# EAGLE board REAQUIS HIGROM V1.0 placa (EAGLE 7.2.0)
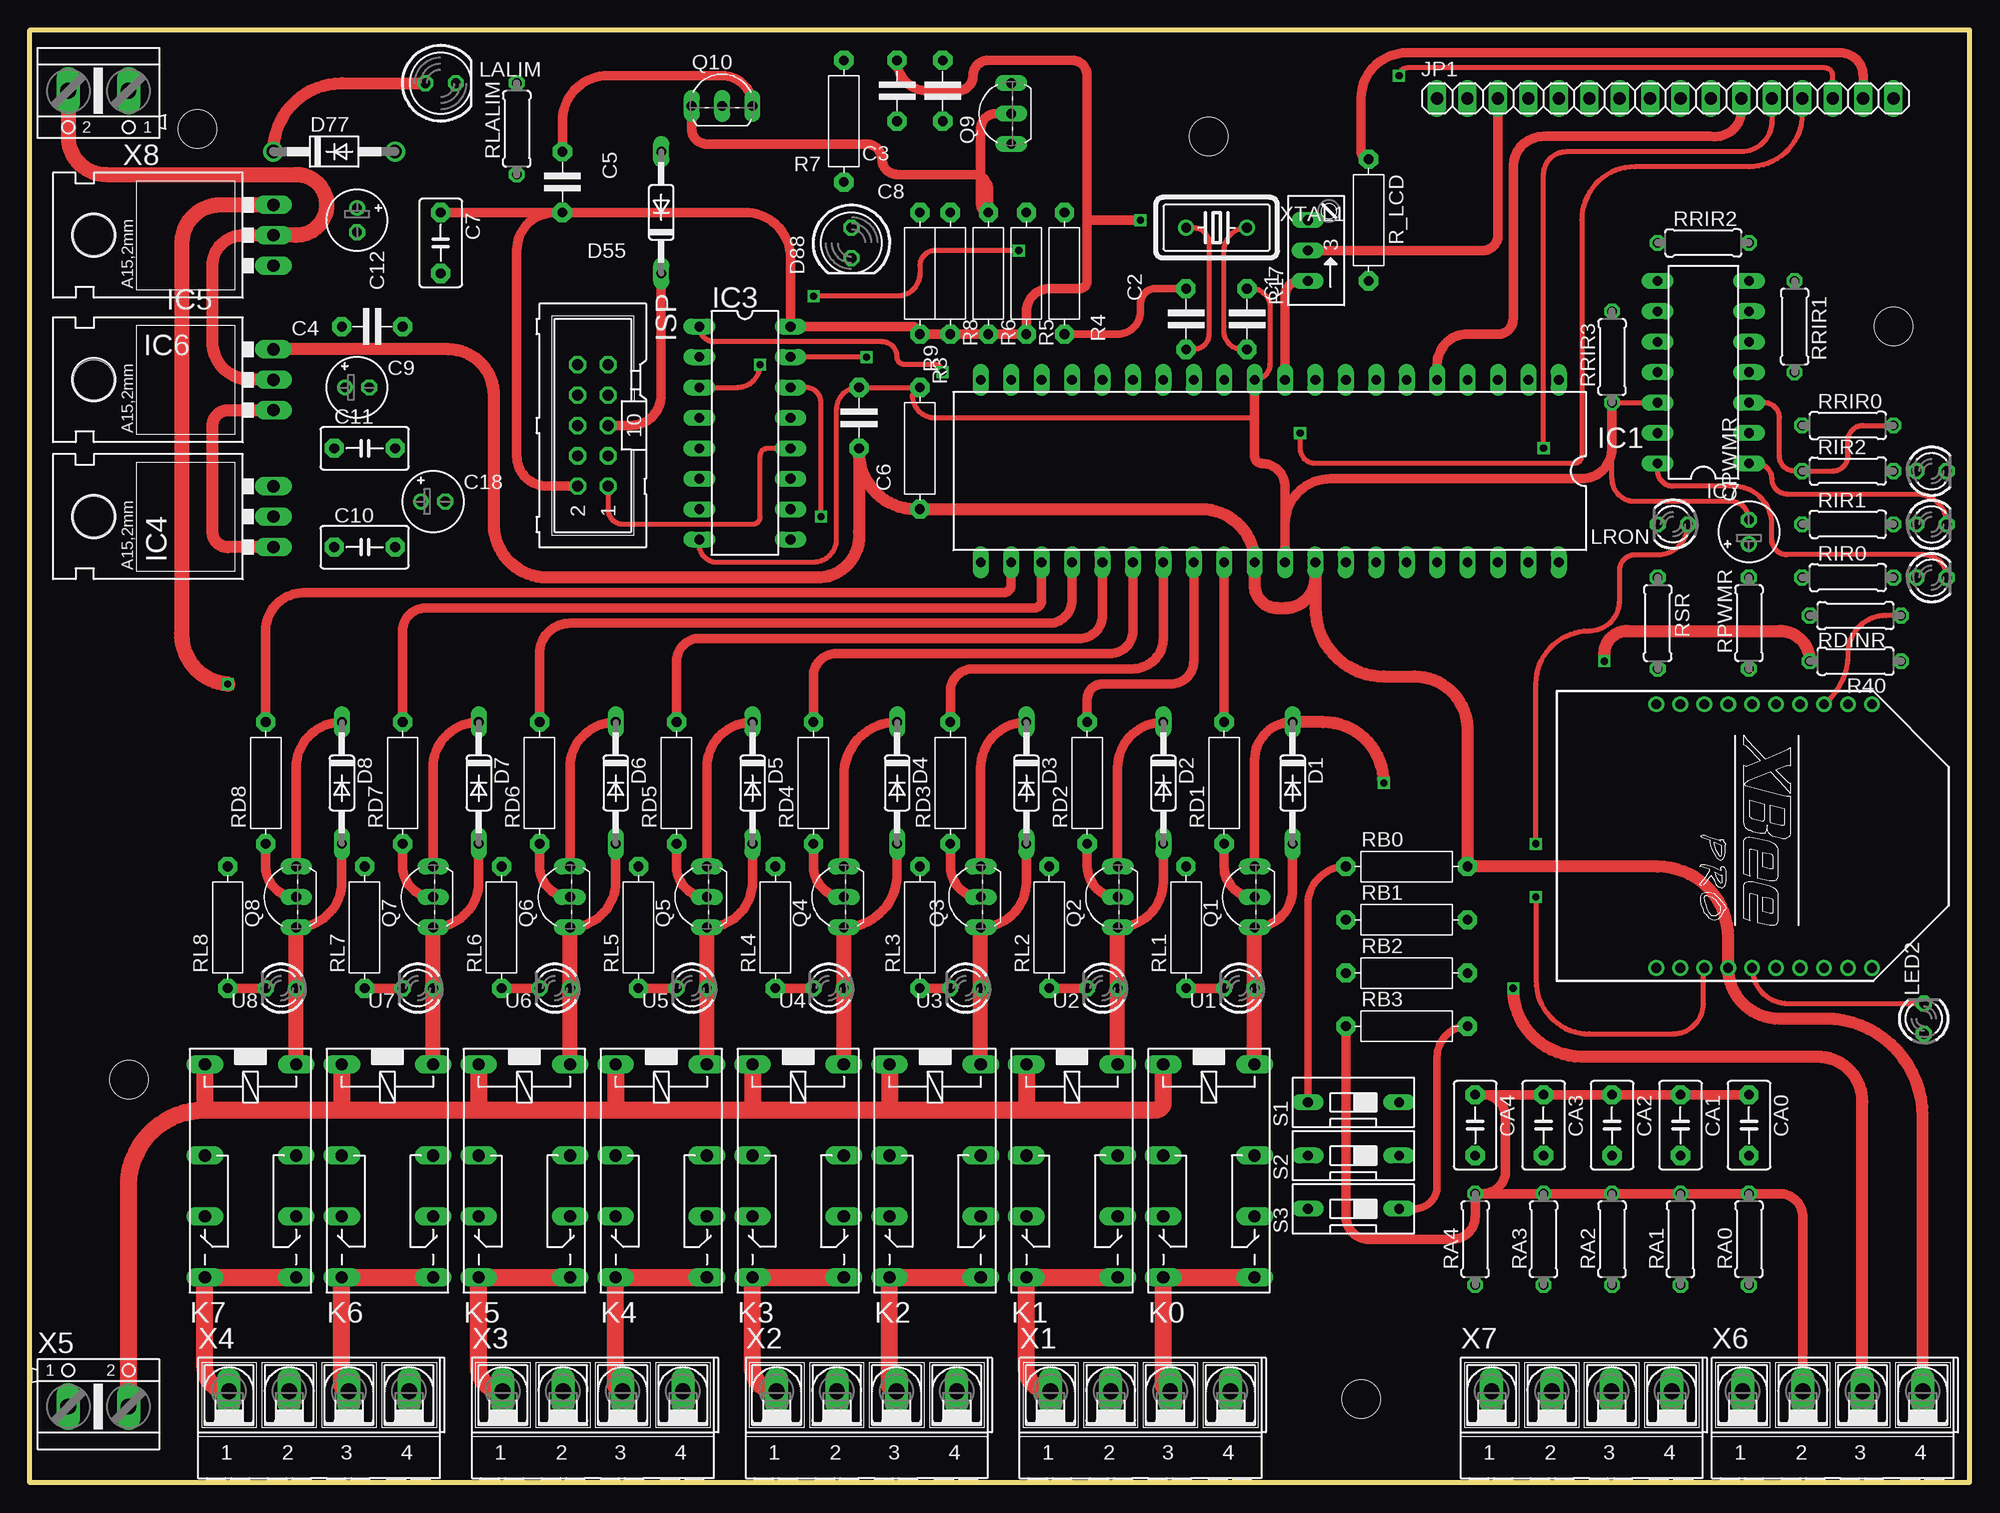
[diagram p0: board, top side]
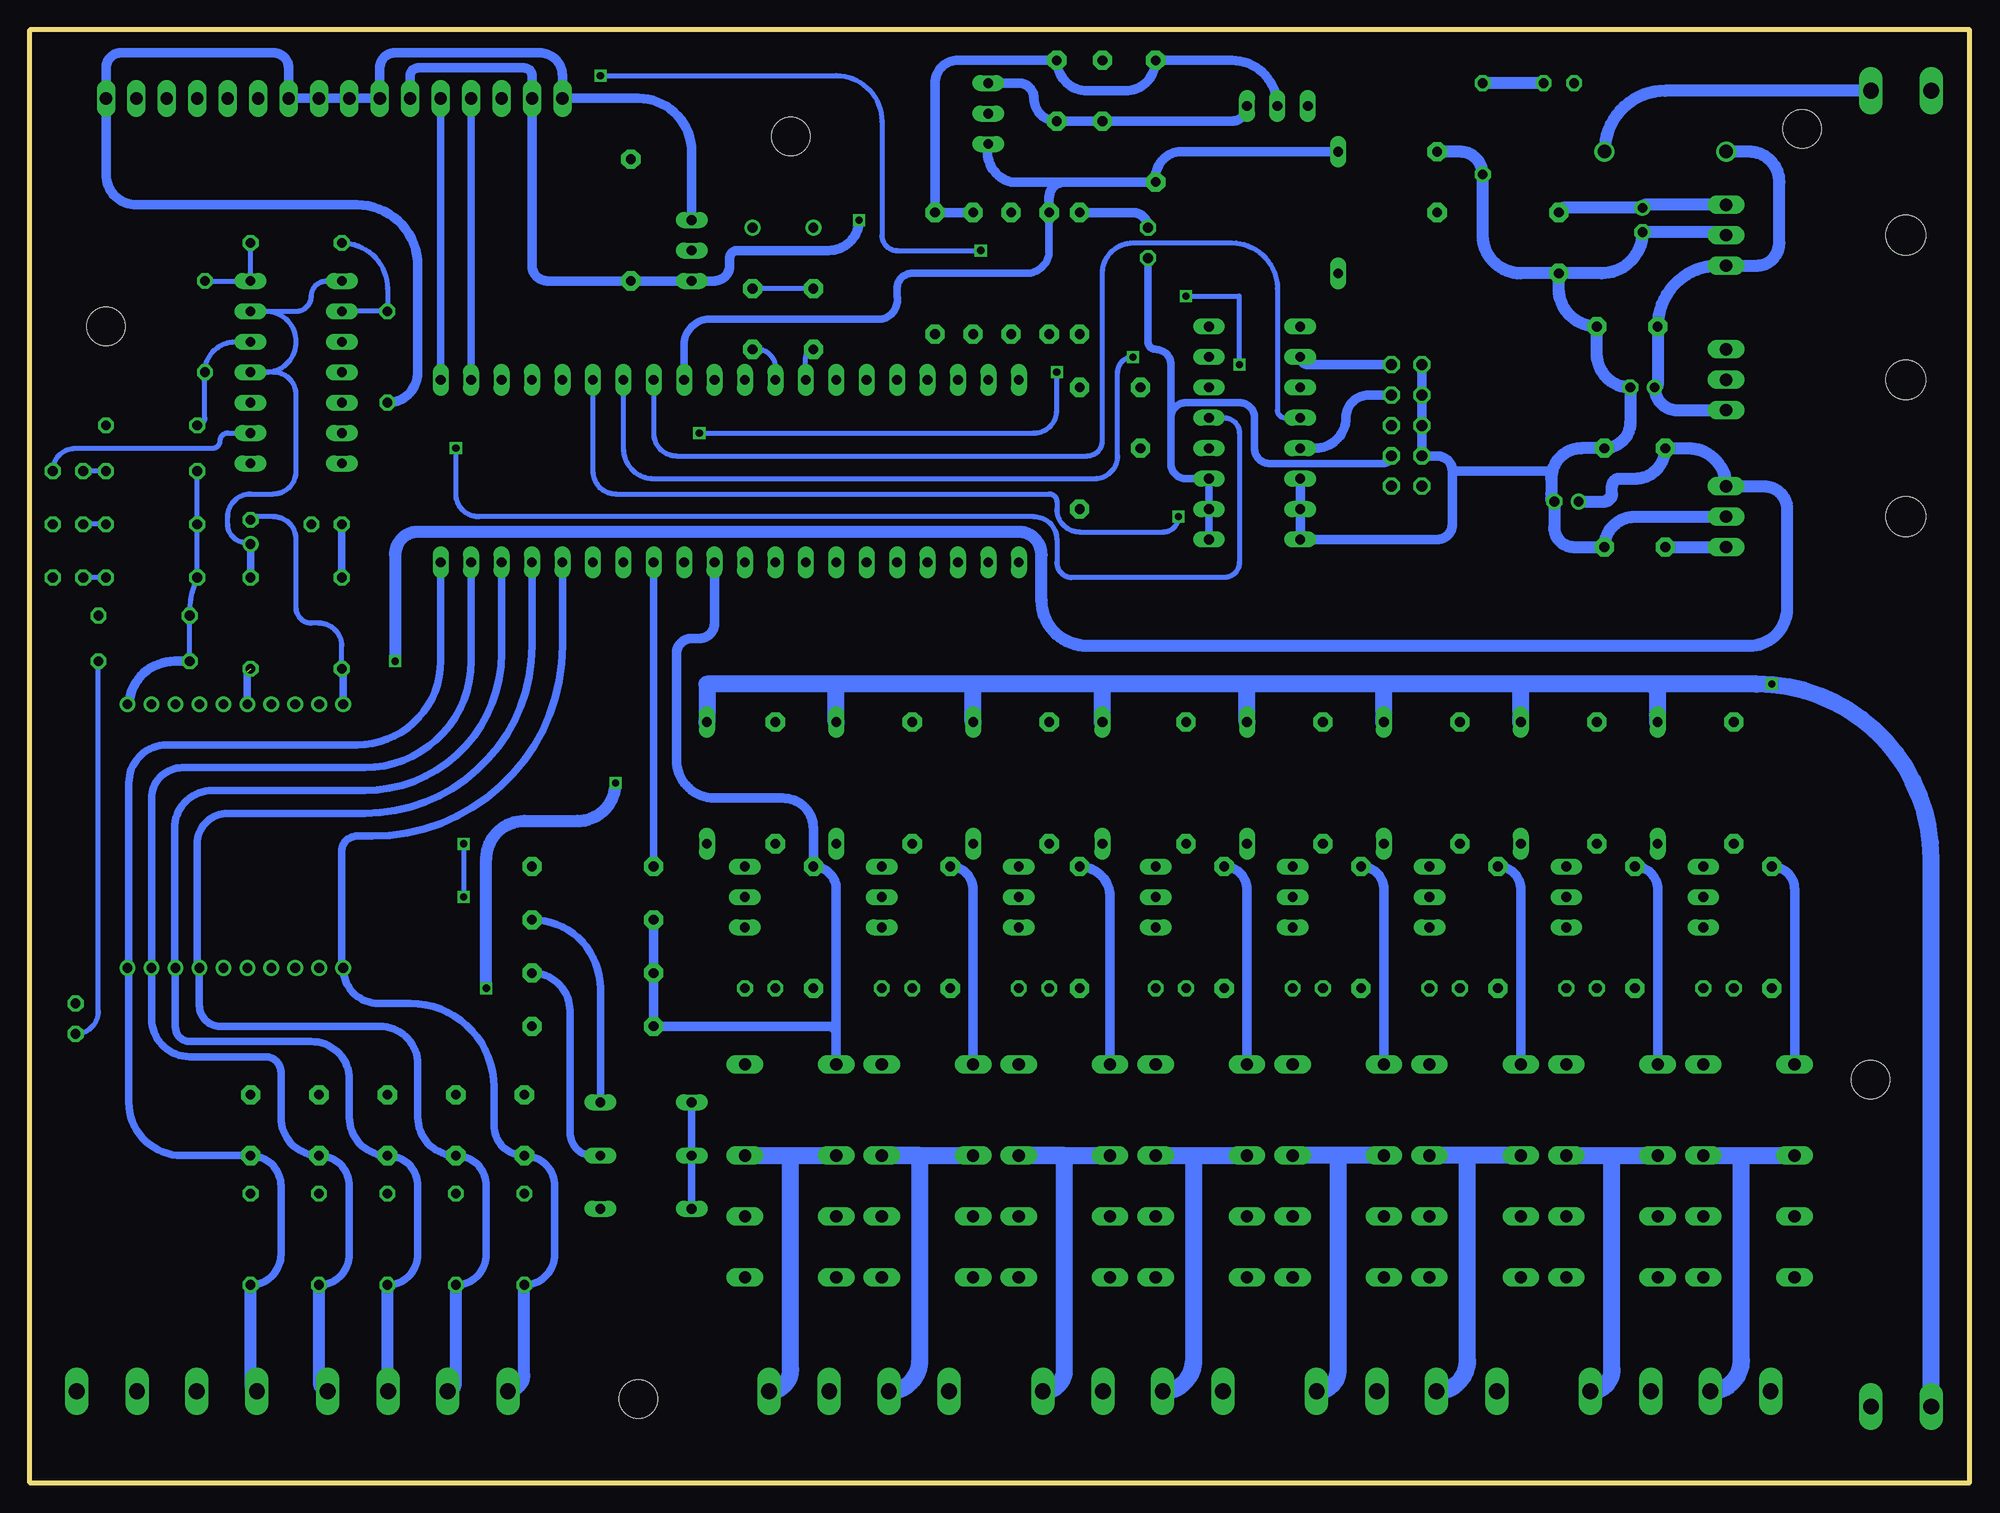
[diagram p1: board, bottom side, seen from below]

Size 161.93 x 121.29 mm. Coordinates in mm from the lower left corner, seen from the top.
Outline: 161.93,0 161.93,121.29 0,121.29 0,0 161.93,0
Copper layers (1*16): Top 0.035mm / dielectric 1.5mm / Bottom 0.035mm
Design rules "terminal": minimum track width 16mil, minimum drill 24mil, track to track 12mil, track to pad 12mil, pad to pad 12mil, via to via 12mil, smd to smd 0mil, copper to edge 40mil, drill to drill 12mil, minimum pad ring 10mil, minimum via ring 8mil, stop-mask expansion 4mil, vias tented up to drill 0mil, thermal gap 10mil
Holes 3.2 mm at 8.26,33.66 13.97,113.03 98.43,112.4 155.58,96.52 111.12,6.99

## Footprints (pad centres in the part's own frame; a part is rotated, then mirrored left to right if it is on the bottom)
C-5 = drill 0.813 pad 1.6 octagon: 1 -2.54,0; 2 2.54,0
C5B3.5 = drill 0.813 pad 1.6 octagon: 1 -2.54,0; 2 2.54,0
E2-5 = drill 0.813 pad 1.27: + -1.016,0 | drill 0.813 pad 1.27 octagon: - 1.016,0
DO35-10 = drill 0.813 long: A 5.08,0; C -5.08,0
DO41-10 = drill 1.118: A 5.08,0; C -5.08,0
LED5MM = drill 0.813 octagon: A -1.27,0; K 1.27,0
DIL40 = drill 0.813 long: 1 -24.13,-7.62; 2 -21.59,-7.62; 3 -19.05,-7.62; 4 -16.51,-7.62; 5 -13.97,-7.62; 6 -11.43,-7.62; 7 -8.89,-7.62; 8 -6.35,-7.62; 9 -3.81,-7.62; 10 -1.27,-7.62; 11 1.27,-7.62; 12 3.81,-7.62; 13 6.35,-7.62; 14 8.89,-7.62; 15 11.43,-7.62; 16 13.97,-7.62; 17 16.51,-7.62; 18 19.05,-7.62; 19 21.59,-7.62; 20 24.13,-7.62; 21 24.13,7.62; 22 21.59,7.62; 23 19.05,7.62; 24 16.51,7.62; 25 13.97,7.62; 26 11.43,7.62; 27 8.89,7.62; 28 6.35,7.62; 29 3.81,7.62; 30 1.27,7.62; 31 -1.27,7.62; 32 -3.81,7.62; 33 -6.35,7.62; 34 -8.89,7.62; 35 -11.43,7.62; 36 -13.97,7.62; 37 -16.51,7.62; 38 -19.05,7.62; 39 -21.59,7.62; 40 -24.13,7.62
DIL16 = drill 0.813 long: 1 -8.89,-3.81; 2 -6.35,-3.81; 3 -3.81,-3.81; 4 -1.27,-3.81; 5 1.27,-3.81; 6 3.81,-3.81; 7 6.35,-3.81; 8 8.89,-3.81; 9 8.89,3.81; 10 6.35,3.81; 11 3.81,3.81; 12 1.27,3.81; 13 -1.27,3.81; 14 -3.81,3.81; 15 -6.35,3.81; 16 -8.89,3.81
78XXL = drill 1.016 long: GND 0,-3.81; IN -2.54,-3.81; OUT 2.54,-3.81 | hole 3.302: 0,11.176
DIL14 = drill 0.813 long: 1 -7.62,-3.81; 2 -5.08,-3.81; 3 -2.54,-3.81; 4 0,-3.81; 5 2.54,-3.81; 6 5.08,-3.81; 7 7.62,-3.81; 8 7.62,3.81; 9 5.08,3.81; 10 2.54,3.81; 11 0,3.81; 12 -2.54,3.81; 13 -5.08,3.81; 14 -7.62,3.81
ML10 = drill 0.914 octagon: 1 -5.08,-1.27; 2 -5.08,1.27; 3 -2.54,-1.27; 4 -2.54,1.27; 5 0,-1.27; 6 0,1.27; 7 2.54,-1.27; 8 2.54,1.27; 9 5.08,-1.27; 10 5.08,1.27
1X16 = drill 1.016 long: 1 -19.05,0; 2 -16.51,0; 3 -13.97,0; 4 -11.43,0; 5 -8.89,0; 6 -6.35,0; 7 -3.81,0; 8 -1.27,0; 9 1.27,0; 10 3.81,0; 11 6.35,0; 12 8.89,0; 13 11.43,0; 14 13.97,0; 15 16.51,0; 16 19.05,0
351 = drill 1.016 long: 1 -3.81,-3.81; 16 -3.81,3.81; O1 8.89,-3.81; O2 8.89,3.81; P1 3.81,-3.81; P2 3.81,3.81; S1 13.97,-3.81; S2 13.97,3.81
LED3MM = drill 0.813 octagon: A -1.27,0; K 1.27,0
TO92-EBC = drill 0.813 long: B 0,-1.27; C -2.54,-1.27; E 2.54,-1.27
R-10 = drill 0.813 pad 1.6 octagon: 1 -5.08,0; 2 5.08,0
RJ9W = drill 0.813 long: A 2.54,0.635; E -2.54,0.635; S 0,0.635
0207/7 = drill 0.813 octagon: 1 -3.81,0; 2 3.81,0
DS-01 = drill 0.813 long: 1 0,-3.81; 2 0,3.81
XBEE-PRO = drill 0.8 pad 1.27: 1 -11,9; 2 -11,7; 3 -11,5; 4 -11,3; 5 -11,1; 6 -11,-1; 7 -11,-3; 8 -11,-5; 9 -11,-7; 10 -11,-9; 11 11,-9; 12 11,-7; 13 11,-5; 14 11,-3; 15 11,-1; 16 11,1; 17 11,3; 18 11,5; 19 11,7; 20 11,9
AK500/4-H = drill 1.321 long: 1 -7.518,0; 2 -2.489,0; 3 2.489,0; 4 7.518,0
AK500/2 = drill 1.321 long: 1 -2.515,0; 2 2.515,0
HC18U-V = drill 0.813: 1 -2.54,0; 2 2.54,0

## Placement (x,y rotation side)
C1  27pF  [C-5]  101.6,97.16 270 top
C2  27pF  [C-5]  96.52,97.16 270 top
C3  100nF  [C-5]  76.2,116.21 90 top
C4  220nF  [C-5]  28.58,96.52 180 top
C5  100nF  [C-5]  44.45,108.59 270 top
C6  100nF  [C-5]  69.22,88.9 270 top
C7  220nF  [C5B3.5]  34.29,103.51 270 top
C8  470nF  [C-5]  72.39,116.21 90 top
C9  10uF  [E2-5]  27.31,91.44 0 top
C10  220nF  [C5B3.5]  27.94,78.11 0 top
C11  220nF  [C5B3.5]  27.94,86.36 0 top
C12  10uF  [E2-5]  27.31,105.41 270 top
C18  10uF  [E2-5]  33.66,81.92 0 top
CA0  470nF  [C5B3.5]  143.51,29.85 270 top
CA1  470nF  [C5B3.5]  137.8,29.85 270 top
CA2  470nF  [C5B3.5]  132.08,29.85 270 top
CA3  470nF  [C5B3.5]  126.37,29.85 270 top
CA4  470nF  [C5B3.5]  120.65,29.85 270 top
CPWMR  1.5u  [E2-5]  143.51,79.38 90 top
D1  1N4148  [DO35-10]  105.41,58.42 270 top
D2  1N4148  [DO35-10]  94.62,58.42 270 top
D3  1N4148  [DO35-10]  83.19,58.42 270 top
D4  1N4148  [DO35-10]  72.39,58.42 270 top
D5  1N4148  [DO35-10]  60.33,58.42 270 top
D6  1N4148  [DO35-10]  48.9,58.42 270 top
D7  1N4148  [DO35-10]  37.47,58.42 270 top
D8  1N4148  [DO35-10]  26.04,58.42 270 top
D55  1N4148  [DO35-10]  52.71,106.05 90 top
D77  1N4004  [DO41-10]  25.4,111.13 0 top
D88  [LED5MM]  68.58,103.51 270 top
IC1  AT90S8535P  [DIL40]  103.5,84.46 180 top
IC3  4053N  [DIL16]  59.69,87.63 270 top
IC4  3.3V  [78XXL]  16.51,80.65 90 top
IC5  3.3 V  [78XXL]  16.51,92.08 90 top
IC6  LM340T05  [78XXL]  16.51,104.14 90 top
IC7  LM339N  [DIL14]  139.7,92.71 90 top
ISP  [ML10]  46.99,88.27 90 top
JP1  [1X16]  136.53,115.57 0 top
K0  351  [351]  98.43,31.12 270 top
K1  351  [351]  87,31.12 270 top
K2  351  [351]  75.56,31.12 270 top
K3  351  [351]  64.14,31.12 270 top
K4  351  [351]  52.71,31.12 270 top
K5  351  [351]  41.28,31.12 270 top
K6  351  [351]  29.85,31.12 270 top
K7  351  [351]  18.42,31.12 270 top
LALIM  [LED5MM]  34.29,116.84 0 top
LED2  [LED3MM]  158.12,38.74 90 top
LIR0  [LED3MM]  158.75,75.56 0 top
LIR1  [LED3MM]  158.75,80.01 0 top
LIR2  [LED3MM]  158.75,84.46 0 top
LRON  [LED3MM]  137.16,80.01 180 top
Q1  BC327  [TO92-EBC]  100.97,48.9 90 top
Q2  BC327  [TO92-EBC]  89.53,48.9 90 top
Q3  BC327  [TO92-EBC]  78.11,48.9 90 top
Q4  BC327  [TO92-EBC]  66.68,48.9 90 top
Q5  BC327  [TO92-EBC]  55.25,48.9 90 top
Q6  BC327  [TO92-EBC]  43.82,48.9 90 top
Q7  BC327  [TO92-EBC]  32.39,48.9 90 top
Q8  BC327  [TO92-EBC]  20.96,48.9 90 top
Q9  BC337  [TO92-EBC]  80.65,114.3 90 top
Q10  BC337  [TO92-EBC]  57.78,116.21 0 top
R3  470  [R-10]  74.3,86.36 270 top
R4  6.8k  [R-10]  86.36,100.97 90 top
R5  43k  [R-10]  83.19,100.97 270 top
R6  10k  [R-10]  80.01,100.97 270 top
R7  1M  [R-10]  67.94,113.67 270 top
R8  10k  [R-10]  76.84,100.97 270 top
R9  150  [R-10]  74.3,100.97 270 top
R17  2k  [RJ9W]  107.31,102.87 90 top
R40  470  [0207/7]  152.4,68.58 180 top
R_LCD  150  [R-10]  111.76,105.41 270 top
RA0  30k  [0207/7]  143.51,20.32 90 top
RA1  30k  [0207/7]  137.8,20.32 90 top
RA2  30k  [0207/7]  132.08,20.32 90 top
RA3  30k  [0207/7]  126.37,20.32 90 top
RA4  30k  [0207/7]  120.65,20.32 90 top
RB0  15K  [R-10]  114.94,51.44 0 top
RB1  30k  [R-10]  114.94,46.99 0 top
RB2  20k  [R-10]  114.94,42.55 0 top
RB3  10k  [R-10]  114.94,38.1 0 top
RD1  1k  [R-10]  99.69,58.42 90 top
RD2  1k  [R-10]  88.27,58.42 90 top
RD3  1k  [R-10]  76.84,58.42 90 top
RD4  1k  [R-10]  65.41,58.42 90 top
RD5  1k  [R-10]  53.97,58.42 90 top
RD6  1k  [R-10]  42.55,58.42 90 top
RD7  1k  [R-10]  31.12,58.42 90 top
RD8  1k  [R-10]  19.69,58.42 90 top
RDINR  10k  [0207/7]  152.4,72.39 180 top
RIR0  470  [0207/7]  151.77,75.56 0 top
RIR1  470  [0207/7]  151.77,80.01 0 top
RIR2  470  [0207/7]  151.77,84.46 0 top
RL1  500  [R-10]  96.52,46.36 90 top
RL2  500  [R-10]  85.09,46.36 90 top
RL3  500  [R-10]  74.3,46.36 90 top
RL4  500  [R-10]  62.23,46.36 90 top
RL5  500  [R-10]  50.8,46.36 90 top
RL6  500  [R-10]  39.37,46.36 90 top
RL7  500  [R-10]  27.94,46.36 90 top
RL8  500  [R-10]  16.51,46.36 90 top
RLALIM  560  [0207/7]  40.64,113.03 90 top
RPWMR  100k  [0207/7]  143.51,71.75 90 top
RRIR0  68k  [0207/7]  151.77,88.27 0 top
RRIR1  56k  [0207/7]  147.32,96.52 270 top
RRIR2  56k  [0207/7]  139.7,103.51 0 top
RRIR3  150k  [0207/7]  132.08,93.98 90 top
RSR  470  [0207/7]  135.89,71.75 270 top
S1  [DS-01]  110.49,31.75 90 top
S2  [DS-01]  110.49,27.31 90 top
S3  [DS-01]  110.49,22.86 90 top
U1  [LED3MM]  100.97,41.28 180 top
U2  [LED3MM]  89.53,41.28 180 top
U3  [LED3MM]  78.11,41.28 180 top
U4  [LED3MM]  66.68,41.28 180 top
U5  [LED3MM]  55.25,41.28 180 top
U6  [LED3MM]  43.82,41.28 180 top
U7  [LED3MM]  32.39,41.28 180 top
U8  [LED3MM]  20.96,41.28 180 top
U$1  XBEEPRO900  [XBEE-PRO]  144.78,53.98 270 top
X1  [AK500/4-H]  92.71,7.62 0 top
X2  [AK500/4-H]  69.85,7.62 0 top
X3  [AK500/4-H]  46.99,7.62 0 top
X4  [AK500/4-H]  24.13,7.62 0 top
X5  [AK500/2]  5.72,6.35 0 top
X6  [AK500/4-H]  150.5,7.62 0 top
X7  [AK500/4-H]  129.54,7.62 0 top
X8  [AK500/2]  5.72,116.21 180 top
XTAL1  4MHz  [HC18U-V]  99.06,104.78 180 top

## Library data of the parts
C1-C6 C8 R3-R9 R_LCD RB0 RB1-RB3 RD1-RD8 RL1-RL8 = discrete
C7 C10 C11 CA0 CA1-CA4 = capacitor-wima
C9 C12 C18 CPWMR = rcl
D1-D8 D55 D77 = diode
D88 LALIM LED2 LIR0 LIR1 LIR2 LRON U1-U8 = led
IC1 = atmel
IC3 = 40xx
IC4-IC6 = v-reg
IC7 = linear
ISP = con-harting-ml
JP1 = pinhead
K0 K1-K7 = relay
Q1-Q8 = transistor-pnp
Q9 Q10 = transistor-npn
R17 = pot
R40 RA0 RA1-RA4 RDINR RIR0 RIR1 RIR2 RLALIM RPWMR RRIR0 RRIR1-RRIR3 RSR = resistor
S1-S3 = switch-dil; OC_FARNELL: unknown; OC_NEWARK: unknown
U$1 = maxstream2
X1-X8 = con-ptr500; OC_FARNELL: unknown; OC_NEWARK: unknown
XTAL1 = crystal

## Nets
(MISO)PB6: IC1.7 IC3.15
(MOSI)PB5: IC1.6 IC3.14
(SCK)PB7: IC1.8 IC3.4
+3V3: C11.1 C18.+ IC4.OUT IC7.3 R40.2 RDINR.2 RIR0.1 RIR1.1 RIR2.1 RRIR0.2 U$1.1
+5V: C5.2 C7.1 C8.2 C12.+ D1.C D2.C D3.C D4.C D5.C D6.C D7.C D8.C IC1.10 IC3.16 IC6.OUT ISP.2 JP1.2 JP1.6 Q1.E Q2.E Q3.E Q4.E Q5.E Q6.E Q7.E Q8.E R5.2 R6.2 R8.2 R9.2 R17.E R_LCD.2 X5.1 X6.3
+12V: D77.A X8.1
CLK1: C2.2 IC1.13 XTAL1.2
CLK2: C1.2 IC1.12 XTAL1.1
DIN: RDINR.1 U$1.3
LED_ENABLE: D88.K IC3.9 IC3.10 IC3.11 ISP.3
LIR2: IC7.2 LIR2.K
MISO: IC3.2 ISP.9
MOSI: IC3.12 ISP.1
N$7: Q9.B Q10.C R6.1
N$9: C3.2 Q10.B R4.2 R5.1 R7.1
N$10: Q8.B RD8.1
N$11: IC7.1 LIR1.K
N$12: D7.A K6.16 Q7.C U7.A
N$13: Q6.B RD6.1
N$14: LRON.K RSR.1
N$15: LALIM.K RLALIM.2
N$16: IC7.14 LIR0.K
N$17: D6.A K5.16 Q6.C U6.A
N$18: Q5.B RD5.1
N$19: D88.A R9.1
N$20: D5.A K4.16 Q5.C U5.A
N$21: Q4.B RD4.1
N$22: D4.A K3.16 Q4.C U4.A
N$23: Q3.B RD3.1
N$24: D3.A K2.16 Q3.C U3.A
N$25: Q2.B RD2.1
N$26: K0.P1 K0.P2 X1.4
N$27: K1.P1 K1.P2 X1.2
N$28: K2.P1 K2.P2 X2.4
N$29: K3.P1 K3.P2 X2.2
N$30: K4.P1 K4.P2 X3.4
N$31: K5.P1 K5.P2 X3.2
N$32: K6.P1 K6.P2 X4.4
N$33: K7.P1 K7.P2 X4.2
N$34: K7.S1 K7.S2 X4.1
N$35: JP1.15 R_LCD.1
N$36: K5.S1 K5.S2 X3.1
N$37: K4.S1 K4.S2 X3.3
N$38: K3.S1 K3.S2 X2.1
N$39: K2.S1 K2.S2 X2.3
N$40: K1.S1 K1.S2 X1.1
N$41: K0.S1 K0.S2 X1.3
N$42: K6.S1 K6.S2 X4.3
N$43: JP1.3 R17.S
N$44: IC1.33 RB0.1 S1.2 S2.2 S3.2
N$45: RB1.2 S1.1
N$46: RB2.2 S2.1
N$47: RB3.2 S3.1
N$48: CA0.2 IC1.40 RA0.1 U$1.20 X6.1
N$49: CA1.2 IC1.39 RA1.1 U$1.19 X7.4
N$50: CA2.2 IC1.38 RA2.1 U$1.18 X7.3
N$51: CA3.2 IC1.37 RA3.1 U$1.17 X7.2
N$52: D8.A K7.16 Q8.C U8.A
N$53: CA4.2 IC1.36 RA4.1 U$1.11 X7.1
N$54: Q7.B RD7.1
N$55: LIR0.A RIR0.2
N$56: LIR1.A RIR1.2
N$57: LIR2.A RIR2.2
N$58: IC7.5 RRIR0.1 RRIR1.2
N$59: IC7.7 RRIR1.1 RRIR2.2
N$60: IC7.9 RRIR2.1 RRIR3.2
N$61: CPWMR.+ IC7.4 IC7.6 IC7.8 RPWMR.2
N$62: LRON.A U$1.13
N$63: RPWMR.1 U$1.6
N$64: LED2.K U$1.15
N$65: LED2.A R40.1
N$66: D2.A K1.16 Q2.C U2.A
N$67: Q1.B RD1.1
N$68: D1.A K0.16 Q1.C U1.A
N$96: RL1.1 U1.K
N$163: RL8.1 U8.K
N$165: RL7.1 U7.K
N$169: RL6.1 U6.K
N$171: RL5.1 U5.K
N$174: RL4.1 U4.K
N$177: RL3.1 U3.K
N$180: RL2.1 U2.K
P-RESET: D55.C ISP.5
PB0: IC1.1 JP1.5
PB1: IC1.2 JP1.4
PB2: IC1.3
PB3: IC1.4
PB4: IC1.5 JP1.11
PB5: IC3.13 JP1.12
PB6: IC3.1 JP1.13
PB7: IC3.3 JP1.14
PC0: IC1.22 RD8.2
PC1: IC1.23 RD7.2
PC2: IC1.24 RD6.2
PC3: IC1.25 RD5.2
PC4: IC1.26 RD4.2
PC5: IC1.27 RD3.2
PC6: IC1.28 RD2.2
PC7: IC1.29 RD1.2
PE: C1.1 C2.1 C3.1 C4.1 C5.1 C6.1 C7.2 C8.1 C9.- C10.2 C11.2 C12.- C18.- CA0.1 CA1.1 CA2.1 CA3.1 CA4.1 CPWMR.- IC1.11 IC1.31 IC3.6 IC3.7 IC3.8 IC4.GND IC5.GND IC6.GND IC7.12 ISP.4 ISP.6 ISP.8 ISP.10 JP1.1 JP1.7 JP1.8 JP1.9 JP1.10 JP1.16 K0.1 K1.1 K2.1 K3.1 K4.1 K5.1 K6.1 K7.1 Q9.E Q10.E R3.1 R4.1 R17.A RA0.2 RA1.2 RA2.2 RA3.2 RA4.2 RB1.1 RB2.1 RB3.1 RL1.2 RL2.2 RL3.2 RL4.2 RL5.2 RL6.2 RL7.2 RL8.2 RLALIM.1 RRIR3.1 RSR.2 U$1.10 X5.2 X6.2 X8.2
RST: D55.A IC1.9 Q9.C R7.2 R8.1
SCK: IC3.5 ISP.7
V+: C4.2 C9.+ C10.1 D77.C IC4.IN IC5.IN IC6.IN LALIM.A
VCC: C6.2 IC1.30 IC1.32 IC5.OUT R3.2 RB0.2 U$1.14 X6.4

## Tracks (layer width: path | path; a pad name or v marks a point on that pad's centre or on a via)
(MISO)PB6  (via drill 0.6)
  Top 0.406: v69.85,93.98 IC3.15
  Bottom 0.406: IC1.7 112.4,86.36 arc-90 109.86,83.82 73.03,83.82 arc-90 71.12,85.73 71.12,92.71 arc90 v69.85,93.98
(MOSI)PB5  (via drill 0.6)
  Top 0.406: v66.04,80.65 66.04,90.17 arc90 64.77,91.44 IC3.14
  Bottom 0.406: IC1.6 114.94,84.46 arc-90 113.03,82.55 76.84,82.55 arc90 76.2,81.92 76.2,81.28 arc-90 74.3,79.38 67.31,79.38 arc-90 v66.04,80.65
(SCK)PB7
  Bottom 0.406: IC1.8 109.86,87.63 arc-90 107.95,85.73 73.66,85.73 arc-90 72.39,87 72.39,100.97 arc90 69.85,103.51 61.59,103.51 arc90 57.78,99.7 57.78,89.54 arc-90 57.15,88.9 IC3.4
+3V3  (via drill 0.6)
  Top 0.406: IC7.3 144.78,90.17 arc-90 146.05,88.9 146.05,85.73 arc90 147.32,84.46 RIR2.1 150.5,84.46 arc90 151.77,85.73 151.77,87 arc-90 153.03,88.27 RRIR0.2
  Top 1.016: v131.44,68.58 131.44,69.22 arc-90 133.35,71.12 146.05,71.12 arc-90 R40.2
  Bottom 0.406: U$1.1 arc90 150.18,68.58 R40.2 RDINR.2 arc23 RIR0.1 RIR1.1 RIR2.1
  Bottom 0.61: C18.+ 31.12,81.92 arc-90 29.85,83.19 arc90 29.21,83.82 | 27.94,83.82 arc-90 C11.1 | 23.5,86.36 arc90 IC4.OUT
  Bottom 0.813: 149.86,68.58 arc-90 153.67,64.77 arc90 149.86,68.58 | 149.86,68.58 R40.2
  Bottom 1.016: IC4.OUT arc-90 23.5,86.36 | 23.5,86.36 C11.1 arc90 27.94,83.82 29.21,83.82 arc-90 29.85,83.19 29.85,82.55 arc90 30.48,81.92 C18.+ | 23.5,86.36 arc90 IC4.OUT | IC4.OUT 17.15,83.19 arc90 15.24,81.28 15.24,73.03 arc90 18.42,69.85 73.66,69.85 arc90 77.47,73.66 77.47,77.47 arc-90 79.38,79.38 129.54,79.38 arc-90 131.44,77.47 v131.44,68.58
+5V  (via drill 0.6)
  Top 0.813: Q8.E 22.23,59.69 arc-90 D8.C | Q7.E 33.66,59.69 arc-90 D7.C | Q6.E 45.09,59.69 arc-90 D6.C | Q4.E 67.94,59.06 arc-90 D4.C | Q3.E 79.38,59.69 arc-90 D3.C | Q2.E 90.81,59.69 arc-90 D2.C | Q1.E 102.24,60.33 arc-90 D1.C | Q5.E 56.52,59.69 arc-90 D5.C | C7.1 43.82,106.05 | 43.82,106.05 C5.2 59.69,106.05 arc-90 63.5,102.24 IC3.16 73.66,96.52 arc-90 R9.2 R8.2 R6.2 | 80.65,95.89 R6.2 | R6.2 R5.2 83.19,97.79 arc-90 85.09,99.7 87.63,99.7 arc90 88.27,100.33 88.27,105.41 | ISP.2 43.18,83.19 arc-90 40.64,85.73 40.64,102.87 arc-90 43.82,106.05 | C8.2 arc90 74.93,116.21 77.47,116.21 arc90 78.74,117.48 arc-90 80.01,118.75 87,118.75 arc-90 88.27,117.48 88.27,105.41 | R17.E 106.05,100.33 arc90 104.78,99.06 IC1.10 | v92.71,105.41 88.27,105.41
  Top 1.016: X6.3 152.98,31.8 arc90 149.22,35.56 129.54,35.56 arc-90 v123.83,41.28 | v113.03,58.42 arc90 107.95,63.5 D1.C
  Top 1.27: v16.51,66.68 arc-90 12.7,71.12 12.7,103.51 arc-90 15.88,106.68 IC6.OUT
  Bottom 0.813: 26.04,66.68 26.67,66.68 | v92.71,105.41 arc90 95.25,102.87 102.87,102.87 arc-90 103.5,102.24 103.5,101.6 arc90 104.78,100.33 R17.E R_LCD.2 | JP1.6 130.18,117.48 arc90 129.54,118.11 120.65,118.11 arc90 120.02,117.48 JP1.2 120.02,101.6 arc-90 118.75,100.33 R_LCD.2 | 111.12,100.33 R_LCD.2
  Bottom 1.016: v123.83,41.28 123.83,52.07 arc90 120.65,55.25 116.21,55.25 arc-90 v113.03,58.42 | IC6.OUT 27.05,106.68 arc-90 C12.+ 33.91,106.43 arc-90 C7.1
  Bottom 1.27: 48.9,66.68 v16.51,66.68
  Bottom 1.422: D8.C 26.04,66.68 | 37.47,66.68 26.67,66.68 17.78,66.68 arc90 3.2,52.1 X5.1 | 37.47,66.68 48.9,66.68 | 48.9,66.68 60.33,66.68 | 60.33,66.68 72.39,66.68 | 72.39,66.68 83.19,66.68 | 83.19,66.68 94.62,66.68 | 94.62,66.68 105.41,66.68 D1.C | D7.C 37.47,66.68 | D6.C 48.9,66.68 | D2.C 94.62,66.68 | D3.C 83.19,66.68 | D4.C 72.39,66.68 | D5.C 60.33,66.68
+12V
  Bottom 1.016: X8.1 25.4,116.21 arc-90 D77.A
CLK1
  Top 0.406: XTAL1.2 97.16,104.78 arc-90 98.43,103.51 98.43,95.89 arc-90 97.16,94.62 C2.2
  Bottom 0.406: IC1.13 97.16,93.98 arc90 C2.2
CLK2
  Top 0.406: C1.2 100.97,94.62 arc-90 99.69,96.52 99.69,102.87 arc-90 XTAL1.1
  Bottom 0.406: IC1.12 99.69,93.35 arc-90 C1.2
DIN
  Top 0.406: RDINR.1 154.94,72.39 arc90 151.77,69.22 arc-50 U$1.3
LED_ENABLE
  Bottom 0.61: D88.K 68.58,95.25 arc-90 67.94,94.62 arc90 66.68,93.35 66.68,88.9 | 66.68,85.09 arc-90 65.41,83.82 | IC3.9 IC3.10 IC3.11 65.41,83.82 | 65.41,83.82 arc90 66.68,85.09 | 66.68,85.09 66.68,88.9 | 66.68,88.9 arc90 65.41,90.17 60.96,90.17 arc90 59.69,88.9 59.69,86.36 arc-90 58.42,85.09 48.9,85.09 arc-90 ISP.3
LIR2
  Bottom 0.406: LIR2.K arc90 158.12,86.36 146.69,86.36 arc-90 146.05,87 arc90 145.42,87.63 IC7.2
MISO
  Bottom 0.813: ISP.9 55.25,93.35 arc90 IC3.2
MOSI
  Top 0.406: ISP.1 48.26,81.28 arc90 49.53,80.01 60.33,80.01 arc90 60.96,80.65 60.96,85.73 arc-90 61.59,86.36 IC3.12
N$7
  Top 0.813: Q10.C 55.25,113.03 arc90 56.52,111.76 69.85,111.76 arc-90 71.12,110.49 arc90 72.39,109.22 78.74,109.22 arc-90 80.01,107.95 R6.1 arc-90 79.38,106.68 79.38,113.03 arc-90 80.65,114.3 Q9.B
N$9
  Bottom 0.813: Q10.B arc-90 61.59,118.75 R7.1 arc90 70.49,116.21 73.66,116.21 arc90 C3.2 84.46,118.75 arc-90 86.36,116.84 R4.2 R5.1
N$10
  Top 0.813: Q8.B arc-90 19.69,51.44 RD8.1
N$11
  Top 0.406: IC7.1 144.15,85.09 arc-90 145.42,83.82 arc90 146.69,82.55 157.48,82.55 arc-90 LIR1.K
N$12
  Top 0.813: Q7.C arc90 37.47,50.17 D7.A
  Top 1.27: K6.16 U7.A Q7.C
N$13
  Top 0.813: Q6.B arc-90 42.55,51.44 RD6.1
N$14
  Bottom 0.61: RSR.1 LRON.K
N$15
  Bottom 1.016: LALIM.K RLALIM.2
N$16
  Top 0.406: LIR0.K arc90 158.12,77.47 146.69,77.47 arc-90 145.42,78.74 145.42,80.01 arc90 142.24,83.19 137.16,83.19 arc-90 135.89,84.46 IC7.14
N$17
  Top 0.813: Q6.C arc90 48.9,50.17 D6.A
  Top 1.27: K5.16 U6.A Q6.C
N$18
  Top 0.813: Q5.B arc-90 53.97,51.44 RD5.1
N$19
  Bottom 0.813: R9.1 69.85,106.05 arc90 D88.A
N$20
  Top 0.813: Q5.C arc90 60.33,50.17 D5.A
  Top 1.27: K4.16 U5.A Q5.C
N$21
  Top 0.813: Q4.B arc-90 65.41,51.44 RD4.1
N$22
  Top 0.813: Q4.C arc90 72.39,50.8 D4.A
  Top 1.27: K3.16 U4.A Q4.C
N$23
  Top 0.813: Q3.B arc-90 76.84,51.44 RD3.1
N$24
  Top 0.813: Q3.C arc90 83.19,50.17 D3.A
  Top 1.27: K2.16 U3.A Q3.C
N$25
  Top 0.813: Q2.B arc-90 88.27,51.44 RD2.1
N$26
  Bottom 1.422: X1.4 arc-90 98.43,9.42 98.43,27.31 K0.P1 K0.P2
N$27
  Bottom 1.422: X1.2 arc-90 87.63,10.21 87.63,27.31 K1.P2 K1.P1
N$28
  Bottom 1.422: X2.4 arc-90 75.56,9.42 75.56,27.31 K2.P2 K2.P1
N$29
  Bottom 1.422: X2.2 arc-90 64.77,10.21 64.77,27.31 K3.P2 K3.P1
N$30
  Bottom 1.422: K4.P1 52.71,27.31 | 52.71,27.31 K4.P2 | X3.4 arc-90 52.71,9.42 52.71,27.31
N$31
  Bottom 1.422: K5.P1 41.91,27.31 | 41.91,27.31 K5.P2 | X3.2 arc-90 41.91,10.21 41.91,27.31
N$32
  Bottom 1.422: K6.P2 29.85,27.31 | 29.85,27.31 K6.P1 | X4.4 arc-90 29.85,9.42 29.85,27.31
N$33
  Bottom 1.422: K7.P2 19.05,27.31 | 19.05,27.31 K7.P1 | X4.2 arc-90 19.05,10.21 19.05,27.31
N$34
  Top 1.422: X4.1 arc-90 14.61,9.63 K7.S1 K7.S2
N$35
  Top 0.813: JP1.15 153.03,117.48 arc90 151.13,119.38 114.94,119.38 arc90 111.12,115.57 111.12,111.13 arc90 R_LCD.1
N$36
  Top 1.422: X3.1 arc-90 37.47,9.63 K5.S1 K5.S2
N$37
  Top 1.422: X3.3 arc-90 48.9,8.2 K4.S1 K4.S2
N$38
  Top 1.422: X2.1 arc-90 60.33,9.63 K3.S1 K3.S2
N$39
  Top 1.422: X2.3 arc-90 71.75,8.2 K2.S1 K2.S2
N$40
  Top 1.422: X1.1 arc-90 83.19,9.63 K1.S1 K1.S2
N$41
  Top 1.422: X1.3 arc-90 94.62,8.2 K0.S1 K0.S2
N$42
  Top 1.422: X4.3 arc-90 26.04,8.2 K6.S1 K6.S2
N$43
  Top 0.813: JP1.3 122.56,104.14 arc-90 121.28,102.87 R17.S
N$44
  Top 0.61: RB0.1 arc90 106.68,48.26 S1.2
  Bottom 0.61: S3.2 S2.2 S1.2 | RB0.1 IC1.33
N$45
  Bottom 0.61: S1.1 114.3,41.28 arc-90 RB1.2
N$46
  Bottom 0.61: S2.1 114.94,27.31 arc90 116.84,29.21 116.84,39.37 arc-90 RB2.2
N$47
  Top 0.61: S3.1 115.57,22.86 arc90 117.47,24.77 117.47,35.56 arc-90 RB3.2
N$48
  Bottom 0.61: RA0.1 arc-90 140.97,19.05 140.97,24.77 arc-90 CA0.2 149.22,27.31 arc90 153.67,31.75 153.67,42.87 arc-90 U$1.20 arc-90 153.67,43.09 153.67,58.42 arc90 150.5,61.6 134.62,61.6 arc-90 127.64,68.58 IC1.40
  Bottom 1.016: X6.1 arc90 143.51,8.15 RA0.1
N$49
  Bottom 0.61: RA1.1 arc-90 135.25,19.05 135.25,24.77 arc-90 CA1.2 arc90 140.97,30.48 140.97,34.29 arc-90 142.24,35.56 148.59,35.56 arc90 151.77,38.74 151.77,39.37 arc90 151.78,39.38 U$1.19 arc-90 151.77,42.99 151.77,57.15 arc90 149.22,59.69 133.99,59.69 arc-90 125.09,68.58 IC1.39
  Bottom 1.016: X7.4 arc90 137.8,8.36 RA1.1
N$50
  Bottom 0.61: RA2.1 arc-90 129.54,19.05 129.54,24.77 arc-90 CA2.2 arc90 135.25,30.48 135.25,33.66 arc-90 138.43,36.83 148.59,36.83 arc90 149.78,38.02 U$1.18 arc90 149.86,43.06 149.86,54.61 arc90 146.69,57.79 133.99,57.79 arc-90 122.56,69.22 IC1.38
  Bottom 1.016: X7.3 arc90 132.08,7.67 RA2.1
N$51
  Bottom 0.61: RA3.1 arc-90 123.83,19.05 123.83,24.77 arc-90 CA3.2 arc90 129.54,30.48 129.54,34.93 arc-90 132.72,38.1 146.05,38.1 arc90 147.78,39.83 U$1.17 arc90 147.96,43.15 147.96,53.34 arc90 145.42,55.88 133.99,55.88 arc-90 120.02,69.85 IC1.37
  Bottom 1.016: X7.2 arc-90 126.37,8.31 RA3.1
N$52
  Top 0.813: Q8.C arc90 26.04,50.17 D8.A
  Top 1.27: K7.16 U8.A Q8.C
N$53
  Bottom 0.61: RA4.1 arc-90 118.11,19.05 118.11,24.77 arc-90 CA4.2 arc90 123.19,29.85 123.19,33.02 arc-90 130.18,40 132.81,40 arc90 U$1.11 arc90 135.89,43.09 135.89,52.71 arc90 134.62,53.98 133.35,53.98 arc-90 117.47,69.85 IC1.36
  Bottom 1.016: X7.1 arc-90 120.65,8.99 RA4.1
N$54
  Top 0.813: Q7.B arc-90 31.12,51.44 RD7.1
N$55
  Bottom 0.406: RIR0.2 LIR0.A
N$56
  Bottom 0.406: RIR1.2 LIR1.A
N$57
  Bottom 0.406: RIR2.2 LIR2.A
N$58
  Bottom 0.406: RRIR0.1 arc-90 147.32,88.9 RRIR1.2 arc90 144.78,95.25 IC7.5
N$59
  Bottom 0.406: RRIR2.2 IC7.7 RRIR1.1
N$60
  Bottom 0.406: RRIR2.1 arc90 132.08,99.7 RRIR3.2 IC7.9
N$61
  Bottom 0.406: 143.51,78.49 143.89,78.49 arc90 145.42,80.01 145.42,80.65 arc90 143.51,82.55 141.61,82.55 arc-90 139.7,84.46 139.7,90.81 arc-90 141.61,92.71 IC7.4 142.24,92.71 arc-90 139.7,95.25 arc-90 142.24,97.79 IC7.6 139.7,97.79 arc-90 138.43,99.06 arc90 137.16,100.33 IC7.8
  Bottom 0.61: RPWMR.2 143.51,78.49 arc-90 CPWMR.+
N$62  (via drill 0.6)
  Top 0.406: v125.73,53.34 125.73,66.68 arc-90 130.18,71.12 arc90 132.72,73.66 132.72,76.2 arc-90 133.99,77.47 135.89,77.47 arc90 LRON.A | v125.73,48.9 125.73,41.91 arc90 130.18,37.47 137.16,37.47 arc90 139.7,40 139.7,42.9 arc-90 U$1.13
  Bottom 0.406: v125.73,53.34 v125.73,48.9
N$63  (1 unrouted)
  Bottom 0.61: U$1.6 143.78,67.68
N$64
  Top 0.406: U$1.15 arc90 146.75,40 LED2.K
N$65
  Bottom 0.406: LED2.A arc-90 156.21,39.37 R40.1
N$66
  Top 0.813: Q2.C arc90 94.62,50.17 D2.A
  Top 1.27: K1.16 U2.A Q2.C
N$67
  Top 0.813: Q1.B arc-90 99.69,51.44 RD1.1
N$68
  Top 0.813: Q1.C arc90 105.41,49.53 D1.A
  Top 1.27: K0.16 U1.A Q1.C
N$96
  Top 0.813: RL1.1 U1.K
N$163
  Top 0.813: RL8.1 U8.K
N$165
  Top 0.813: RL7.1 U7.K
N$169
  Top 0.813: RL6.1 U6.K
N$171
  Top 0.813: RL5.1 U5.K
N$174
  Top 0.813: RL4.1 U4.K
N$177
  Top 0.813: RL3.1 U3.K
N$180
  Top 0.813: RL2.1 U2.K
P-RESET
  Top 0.813: ISP.5 50.17,88.27 arc90 52.71,90.81 D55.C
PB0
  Bottom 0.61: IC1.1 JP1.5
PB1
  Bottom 0.61: IC1.2 JP1.4
PB4
  Top 0.813: JP1.11 142.88,114.3 arc-90 140.34,112.4 126.37,112.4 arc90 123.83,109.86 123.83,97.16 arc-90 122.56,95.89 120.02,95.89 arc90 117.47,93.35 IC1.5 117.47,91.44
PB5  (via drill 0.6)
  Top 0.406: JP1.12 145.42,113.67 arc-90 142.88,111.13 128.27,111.13 arc90 126.37,109.22 v126.37,86.36
  Bottom 0.406: IC3.13 62.23,88.9 arc90 60.96,87.63 60.96,76.84 arc90 62.23,75.56 74.93,75.56 arc90 76.2,76.84 76.2,78.74 arc-90 78.11,80.65 124.46,80.65 arc90 126.37,82.55 v126.37,86.36
PB6  (via drill 0.6)
  Top 0.406: JP1.13 147.96,114.3 arc-90 143.51,109.86 133.99,109.86 arc90 129.54,105.41 129.54,85.73 arc-90 128.91,85.09 107.31,85.09 arc-90 106.05,86.36 v106.05,87.63 | v76.2,92.71 arc90 75.56,93.35 73.03,93.35 arc-90 72.39,93.98 arc90 71.12,95.25 57.15,95.25 arc-90 IC3.1
  Bottom 0.406: v106.05,87.63 78.11,87.63 arc-90 76.2,89.54 v76.2,92.71
PB7  (via drill 0.6)
  Top 0.406: IC3.3 59.06,91.44 arc90 v60.96,93.35 | JP1.14 150.5,117.48 arc90 149.86,118.11 114.94,118.11 arc90 v114.3,117.48 | v82.55,102.87 75.56,102.87 arc90 74.3,101.6 74.3,100.97 arc-90 72.39,99.06 v65.41,99.06
  Bottom 0.406: v114.3,117.48 94.62,117.48 arc90 90.81,113.67 90.81,104.14 arc-90 89.53,102.87 v82.55,102.87 | v65.41,99.06 60.96,99.06 v60.96,93.35
PC0
  Top 0.813: IC1.22 81.92,74.93 arc-90 81.28,74.3 22.86,74.3 arc90 19.69,71.12 RD8.2
PC1
  Top 0.813: IC1.23 84.46,73.66 arc-90 83.82,73.03 33.02,73.03 arc90 31.12,71.12 RD7.2
PC2
  Top 0.813: IC1.24 87,73.66 arc-90 85.09,71.75 45.09,71.75 arc90 42.55,69.22 RD6.2
PC3
  Top 0.813: IC1.25 89.53,72.39 arc-90 87.63,70.49 55.88,70.49 arc90 53.97,68.58 RD5.2
PC4
  Top 0.813: RD4.2 65.41,67.31 arc-90 67.31,69.22 90.17,69.22 arc90 92.08,71.12 IC1.26
PC5
  Top 0.813: RD3.2 76.84,66.04 arc-90 78.74,67.94 92.08,67.94 arc90 94.62,70.49 IC1.27
PC6
  Top 0.813: RD2.2 88.27,65.41 arc-90 89.53,66.68 95.25,66.68 arc90 97.16,68.58 IC1.28
PC7
  Top 0.813: RD1.2 IC1.29
PE
  Top 0.406: CPWMR.- arc90 141.99,81.92 133.99,81.92 arc-90 132.08,83.82 RRIR3.1 IC7.12 | C1.1 arc-90 103.5,98.43 103.5,93.35 arc-90 IC1.11 | 102.24,88.9 75.56,88.9 arc-90 73.66,90.81 R3.1 C6.1 arc90 67.31,89.54 67.31,78.74 arc-90 65.41,76.84 57.15,76.84 arc-90 IC3.8
  Top 0.61: R4.1 90.81,95.89 arc90 92.71,97.79 92.71,98.43 arc-90 93.98,99.7 C2.1
  Top 0.813: IC1.31 104.78,80.01 | 104.78,80.01 104.78,83.19 arc90 102.87,85.09 arc-90 102.24,85.73 102.24,88.9 IC1.11 | C5.1 44.45,113.67 arc-90 48.26,117.48 57.78,117.48 arc-90 Q10.E | CA0.1 CA1.1 CA2.1 | 131.44,32.38 CA2.1 | CA2.1 CA3.1 121.28,32.38 | 121.28,32.38 CA4.1 | RA4.2 RA3.2 RA2.2 RA1.2 RA0.2 146.05,24.13 arc-90 148.01,22.17 X6.2 | RA4.2 121.28,24.13 arc90 123.19,26.04 123.19,30.48 arc90 121.28,32.38 | RB3.1 109.86,22.23 arc90 111.76,20.32 118.75,20.32 arc90 120.65,22.23 RA4.2 | RRIR3.1 132.08,86.36 arc-90 129.54,83.82 108.59,83.82 arc90 104.78,80.01
  Top 1.016: IC5.GND 18.42,92.08 arc-90 15.24,95.25 15.24,101.6 arc-90 17.78,104.14 IC6.GND
  Top 1.27: X8.2 3.2,112.37 arc90 6.35,109.22 22.23,109.22 arc-90 24.77,106.68 arc-90 22.23,104.14 IC6.GND
  Top 1.422: K7.1 14.61,31.12 | 14.61,31.12 26.04,31.12 | 26.04,31.12 37.47,31.12 | 37.47,31.12 48.9,31.12 | 48.9,31.12 60.33,31.12 | 60.33,31.12 71.75,31.12 | 71.75,31.12 83.19,31.12 | 83.19,31.12 93.98,31.12 arc90 94.62,31.75 K0.1 | K1.1 83.19,31.12 | K2.1 71.75,31.12 | K3.1 60.33,31.12 | K4.1 48.9,31.12 | K5.1 37.47,31.12 | K6.1 26.04,31.12 | X5.2 8.23,24.74 arc-90 14.61,31.12
  Bottom 0.406: RSR.2 135.89,69.85 arc-90 137.8,71.75 138.43,71.75 arc90 139.7,73.03 139.7,78.74 arc-90 141.61,80.65 143.26,80.65 arc-90 CPWMR.- | C2.1 C1.1
  Bottom 0.61: RB3.1 RB2.1 RB1.1 | U$1.10 135.78,67.84 arc-90 RSR.2
  Bottom 0.813: K6.1 26.04,49.53 arc-90 RL7.2 | RL8.2 arc90 14.61,49.53 K7.1 | RL6.2 arc90 37.47,49.53 K5.1 | RL5.2 arc90 48.9,49.53 K4.1 | RL4.2 arc90 60.33,49.53 K3.1 | RL3.2 arc90 71.75,48.9 K2.1 | RL2.2 arc90 83.19,49.53 K1.1 | 94.62,37.47 94.62,49.53 arc-90 RL1.2 96.52,54.61 arc-90 99.06,57.15 104.78,57.15 arc90 107.95,60.33 107.95,69.22 arc90 106.68,70.49 106.05,70.49 arc-90 104.78,71.75 IC1.31 | 94.62,37.47 K0.1 | IC3.6 IC3.7 IC3.8 44.45,78.74 arc-90 43.18,80.01 43.18,84.46 | ISP.10 ISP.8 ISP.6 ISP.4 44.45,85.73 arc90 43.18,84.46 | 43.18,84.46 34.93,84.46 34.93,82.55 | Q10.E arc90 61.59,113.67 C8.1 C3.1 arc90 78.11,115.57 arc-90 79.38,116.84 Q9.E | RB1.1 RB3.1 95.25,38.1 arc90 94.62,37.47 | R17.A 106.68,111.13 arc-90 111.12,115.57 JP1.1 117.47,117.48 arc-90 119.38,119.38 131.44,119.38 arc-90 132.72,118.11 JP1.7 JP1.8 JP1.9 JP1.10 140.34,118.11 | 155.58,118.11 arc90 154.31,119.38 | 141.61,119.38 arc90 140.34,118.11 | 140.34,118.11 arc-90 141.61,119.38 | 141.61,119.38 154.31,119.38 | 154.31,119.38 arc-90 155.58,118.11 | 155.58,118.11 JP1.16 155.58,109.22 arc-90 153.03,106.68 134.62,106.68 arc90 129.54,101.6 129.54,92.71 arc90 RRIR3.1
  Bottom 1.016: C7.2 34.29,99.7 arc-90 C4.1 31.12,94.23 arc-90 C9.- 28.32,88.52 arc90 C11.2 32.39,86.36 arc-90 34.93,83.82 34.93,82.55 34.93,82.17 arc-90 C18.- 34.67,79.76 arc-90 33.02,78.11 C10.2 arc90 27.94,80.65 IC4.GND | IC6.GND arc-90 20.57,104.39 C12.- arc90 30.73,100.97 C7.2 | C7.2 37.47,100.97 arc90 40.64,104.14 RLALIM.1 arc-90 42.55,111.13 C5.1
RST
  Bottom 0.61: IC1.9 107.31,94.62 arc90 105.41,97.16 90.81,97.16 arc-90 89.53,99.06 89.53,99.7 arc90 88.27,100.97 78.74,100.97 arc-90 76.84,102.87 R8.1
  Bottom 0.813: D55.A 66.04,111.13 arc-90 R7.2 75.56,108.59 | 75.56,108.59 80.01,108.59 arc90 Q9.C | 75.56,108.59 arc-90 76.84,107.32 R8.1
SCK
  Bottom 0.813: IC3.5 54.61,86.36 arc-90 52.07,88.9 arc90 50.17,90.81 ISP.7
V+
  Top 1.016: D77.C arc-90 26.04,116.84 LALIM.A | IC4.IN 16.51,78.11 arc-90 15.24,79.38 15.24,88.27 arc-90 16.51,89.54 IC5.IN 20.96,89.54
  Bottom 1.016: C10.1 IC4.IN | IC5.IN 24.38,89.54 arc90 C9.+ arc-90 26.04,91.69 C4.2 arc90 20.96,101.6 IC6.IN 17.78,101.6 arc-90 15.88,103.51 15.88,108.59 arc-90 18.42,111.13 D77.C
VCC
  Top 1.016: X6.4 158.01,30.58 arc90 149.86,38.74 146.02,38.74 arc-90 U$1.14 141.78,45.55 arc90 135.89,51.44 RB0.2 120.02,62.87 arc90 115.57,67.31 113.03,67.31 arc-90 107.31,73.03 107.31,75.56 | IC1.32 107.31,75.56 | 107.31,75.56 arc-90 104.78,73.03 104.14,73.03 arc-90 102.24,74.93 IC1.30 arc90 97.79,81.28 R3.2 arc-90 69.22,85.73 C6.2 69.22,79.38 arc-90 66.04,75.56 43.18,75.56 arc-90 38.74,80.01 38.74,90.81 arc90 34.93,94.62 IC5.OUT